# Altium PCB main.PcbDoc
Units mm, origin at the board's own origin, x right, y up, seen from the top; angles counter-clockwise.
Board outline 44.07 x 68.45 mm, 2 copper layers (Top Layer, Bottom Layer), stack 1.271 mm thick; 46 components, 47 nets, 167 pads, 75 vias.
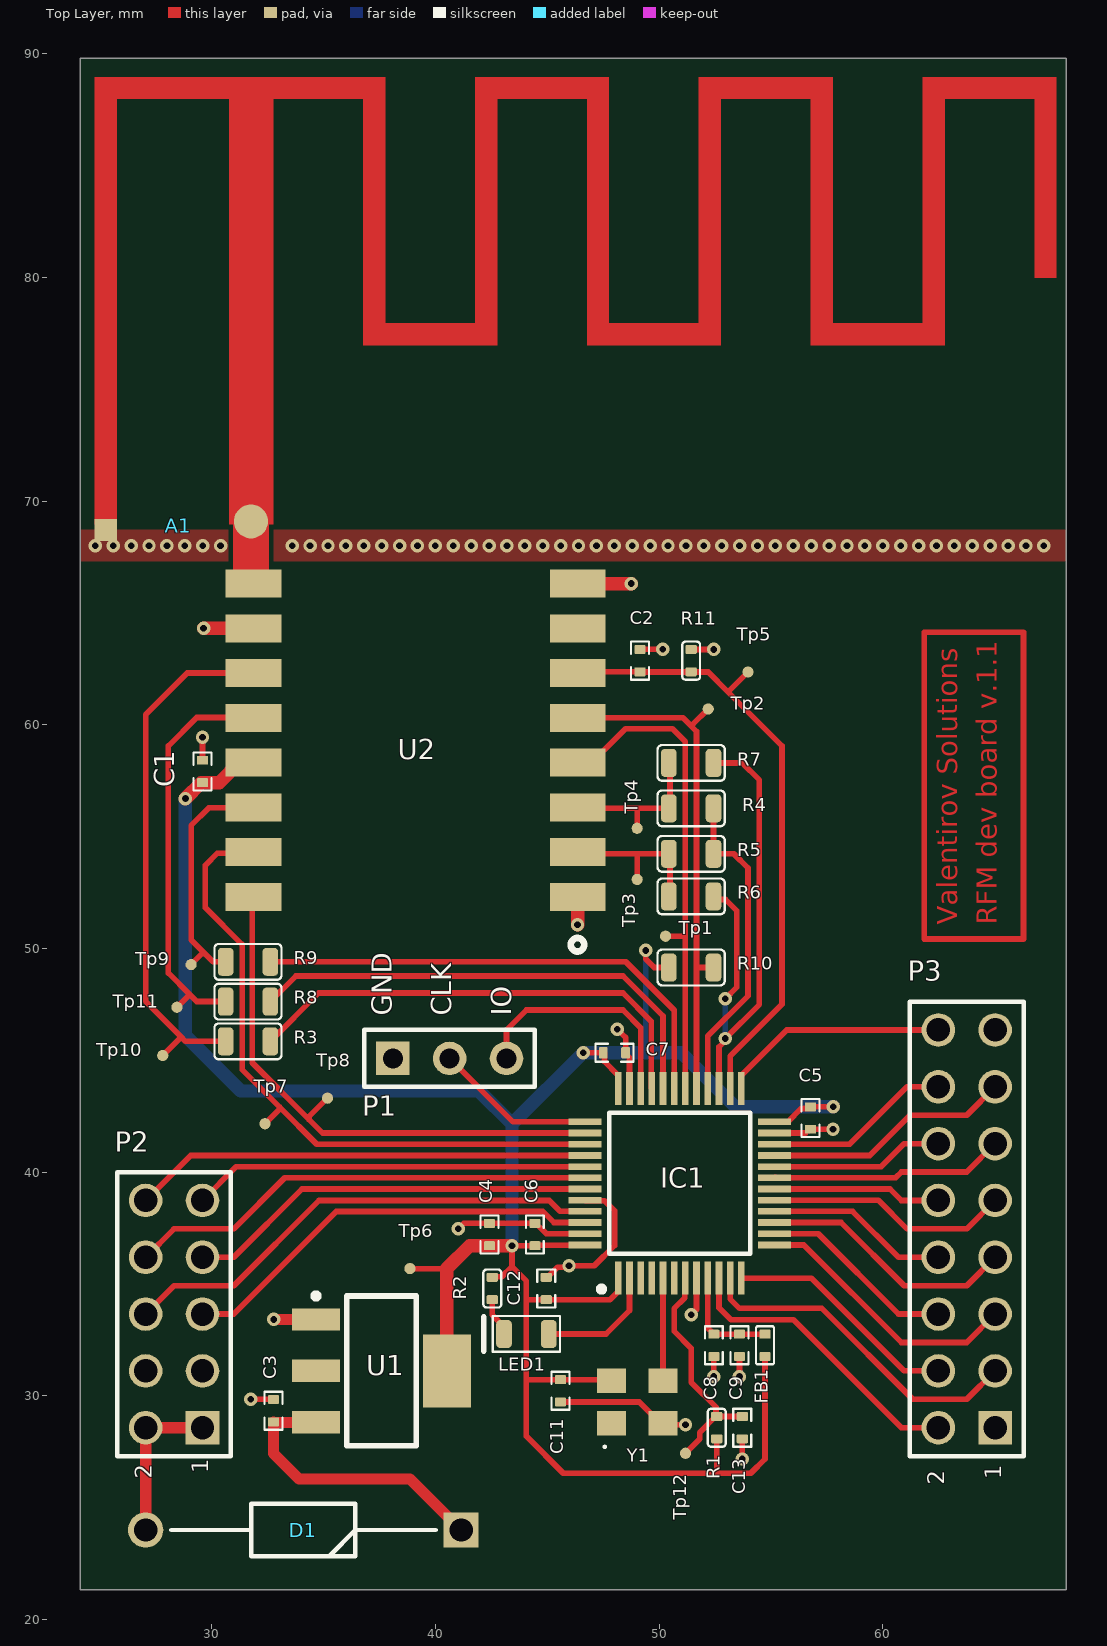
[diagram p0: Top Layer view]
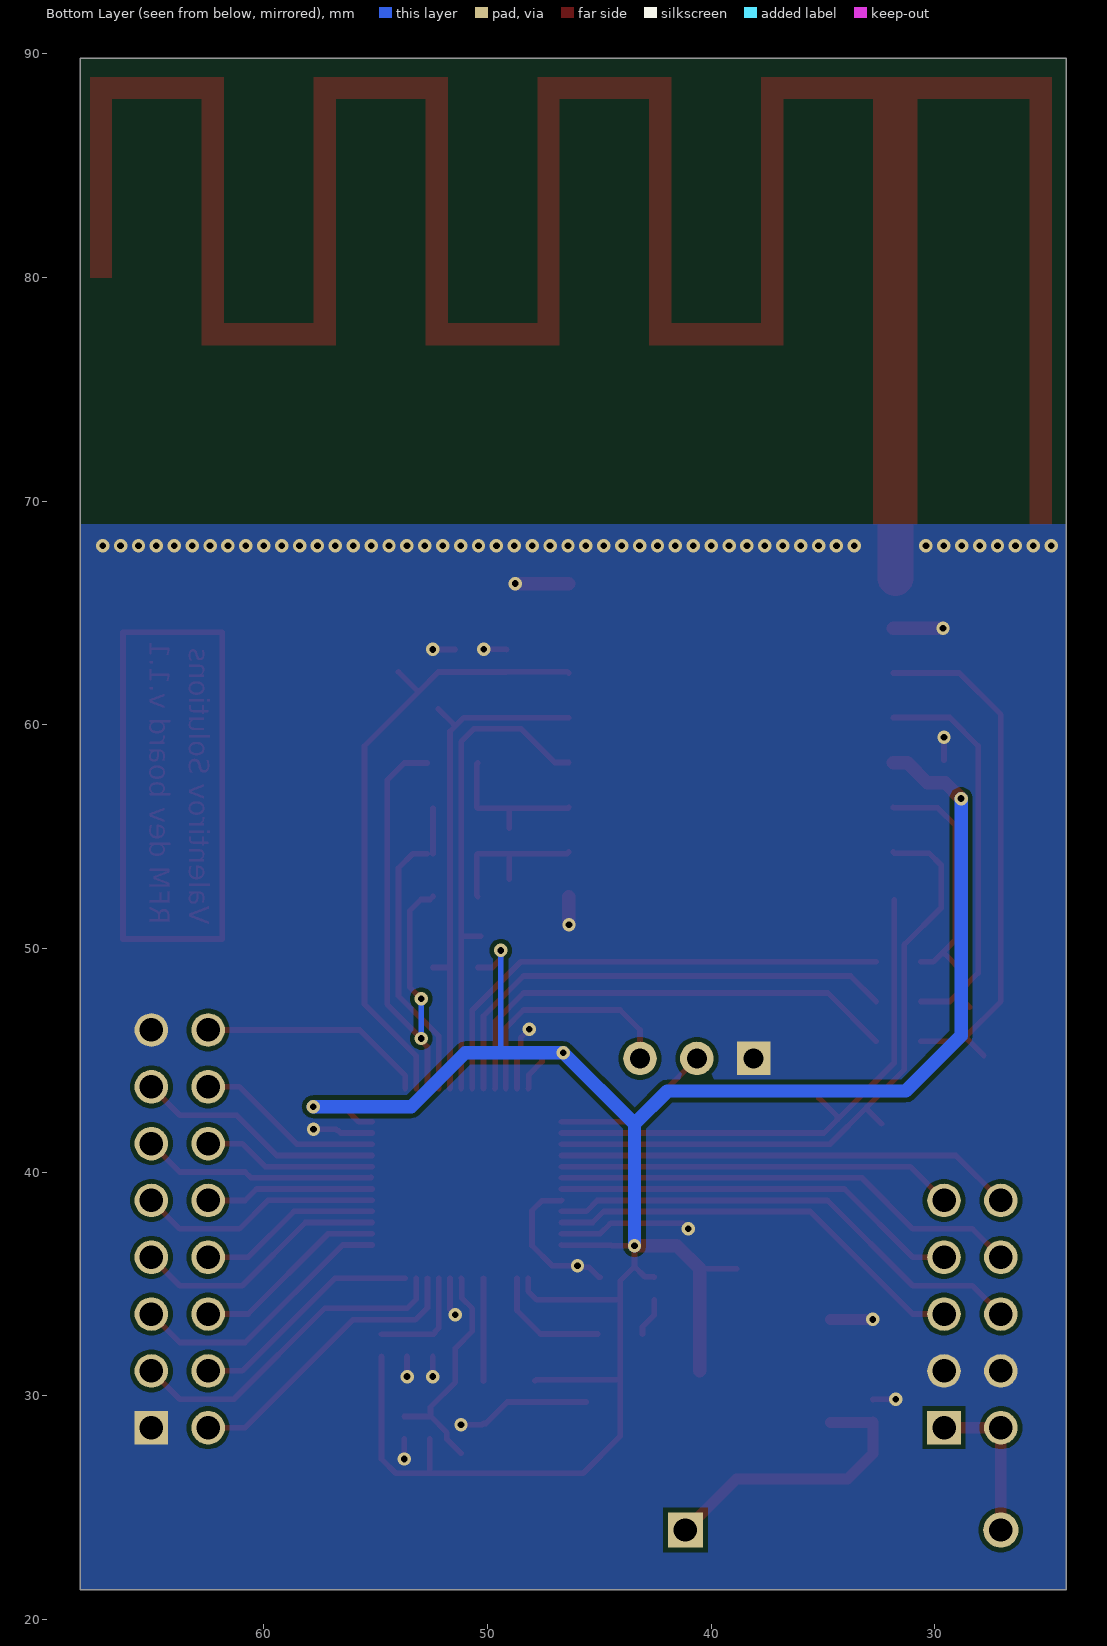
[diagram p1: Bottom Layer view, seen from below]
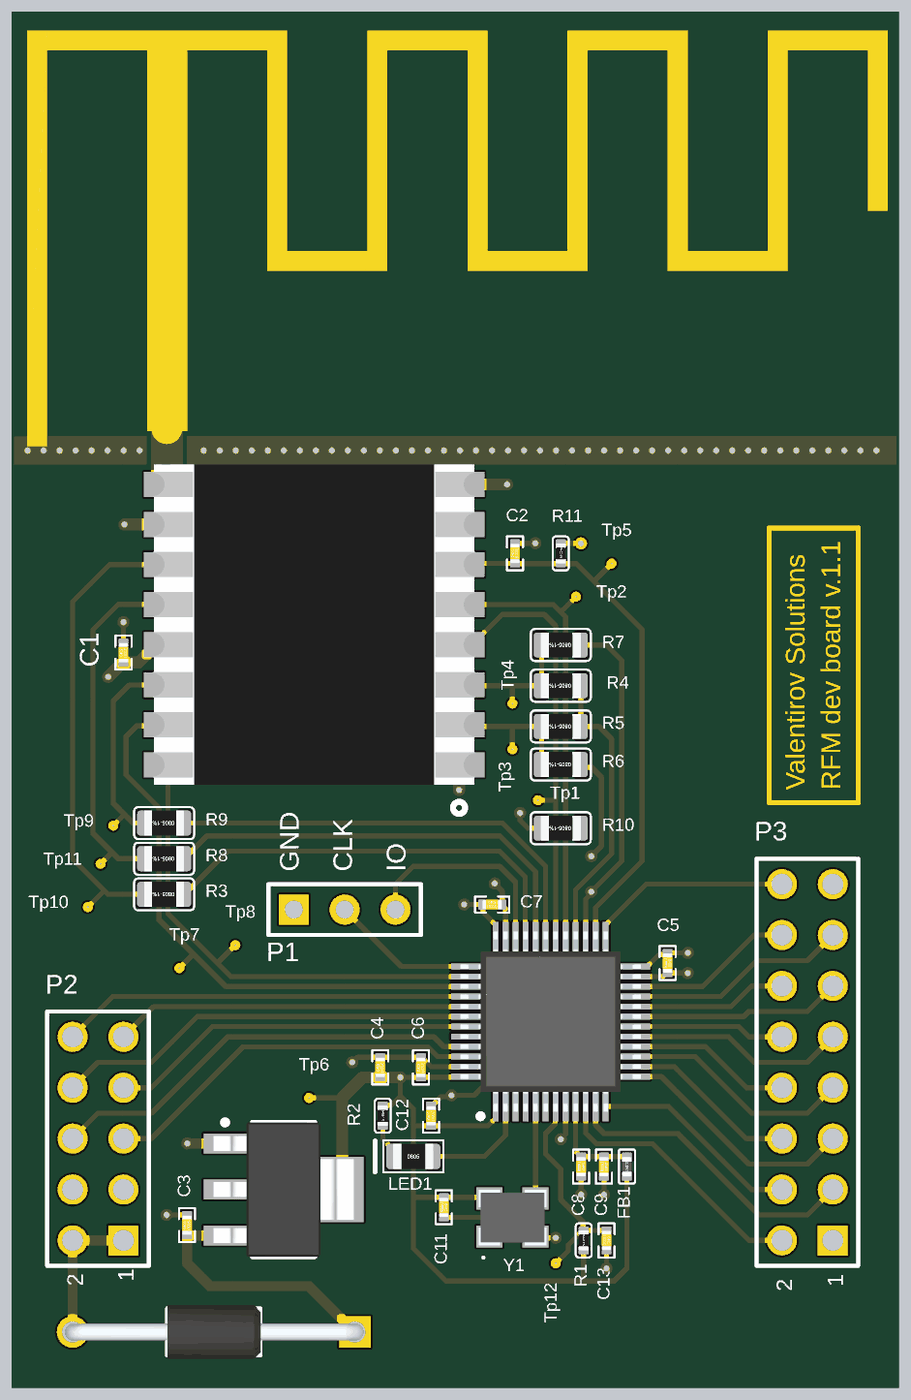
[diagram p2: 3D render of the assembled board from above, using the file's embedded part models]

## Layer stack, top to bottom
Top Solder: solder mask 0.0102, Solder Resist, Dk 3.5
Top Layer: signal copper 0.0356
Dielectric 1: dielectric 1.2, FR-4, Dk 4.6
Bottom Layer: signal copper 0.0356
Bottom Solder: solder mask 0.0102, Solder Resist, Dk 3.5

## Board outline
68.199,21.336 24.13,21.336 24.13,89.789 68.199,89.789

## Design rules (kind name [scope] priority, off if disabled: settings)
Clearance [All] p1: gap=0.2 ignorepadtopadclearanceinfootprint=FALSE
PlaneConnect PlaneConnect_1 [InNet('GND')] p1: planeconnectstyle=Direct reliefexpansion=0.508 reliefentries=4 reliefconductorwidth=0.254 reliefairgap=0.254
PlaneConnect [All] p2: planeconnectstyle=Relief reliefexpansion=0.508 reliefentries=4 reliefconductorwidth=0.254 reliefairgap=0.254
PolygonConnect PolygonConnect_1 [InNet('GND') vs InNet('GND')] p1: connectstyle=Direct reliefconductorwidth=0.254 reliefentries=4 polygonreliefangle="90 Angle" airgapwidth=0.254
PolygonConnect [All] p2: connectstyle=Relief reliefconductorwidth=0.254 reliefentries=4 polygonreliefangle="90 Angle" airgapwidth=0.254
RoutingVias [All] p1: holewidth=0.3 width=0.6 viastyle="Through Hole" minholewidth=0.3 minwidth=0.6 maxholewidth=0.7 maxwidth=1.27
SolderMaskExpansion [All] p1: expansion=0.102 istentingtop=FALSE
Width Width_power [InNet('+3.3V')] p1: maxlimit=1 minlimit=0.254 preferedwidth=0.5 minimp=50.000000 maximp=50.000000 favimp=50.000000
Width [All] p2: maxlimit=1.6 minlimit=0.254 preferedwidth=0.254 bottomlayer_maxwidth=0.254 minimp=50.000000 maximp=50.000000 favimp=50.000000
29 further rules are at their usual default settings.

## Classes and differential pairs
component class rfm: A1 C1 C2 R10 R11 Tp3 Tp4 Tp7 Tp8 Tp9 Tp10 Tp11 U2
component class headers: P1 P2 P3
component class main: C3 C4 C5 C6 C7 C8 C9 C11 C12 C13 D1 FB1 IC1 LED1 R1 R2 R3 R4 R5 R6 R7 R8 R9 Tp1 Tp2 Tp5 Tp6 Tp12 U1 Y1

## Components (designator, comment, footprint, x,y, rotation, side; value= is the part's Value field where it differs from the comment)
A1 "Inverted F antenna" Invertef_F-footprint 24.773,68.961 r0 top net-tie
C1 "100n" "C 0402(1005)x0.5" 29.591,57.912 r90 top
C2 "680p" "C 0402(1005)x0.5" 49.149,62.865 r90 top
C3 "100n" "C 0402(1005)x0.5" 32.766,29.337 r90 top
C4 "10u" "C 0402(1005)x0.5" 42.418,37.211 r90 top
C5 "100n" "C 0402(1005)x0.5" 56.769,42.418 r270 top
C6 "100n" "C 0402(1005)x0.5" 44.45,37.211 r90 top
C7 "100n" "C 0402(1005)x0.5" 48.006,45.339 r0 top
C8 "100n" "C 0402(1005)x0.5" 52.451,32.258 r270 top
C9 "1u" "C 0402(1005)x0.5" 53.594,32.258 r270 top
C11 "0.1u" "C 0402(1005)x0.5" 45.593,30.226 r270 top
C12 "100n" "C 0402(1005)x0.5" 44.958,34.798 r90 top
C13 "100n" "C 0402(1005)x0.5" 53.721,28.575 r270 top
D1 "1N4007-E3_73" DIOAD1405W86L465D235 41.151,24.003 r180 top
FB1 "0.525u" "FB 0402(1005)x0.5" 54.737,32.258 r90 top
IC1 "STM32L4Q5CGT6" QFP50P900X900X160-48N 50.927,39.497 r90 top
LED1 "Blue LED" "R 0805(2012)" 44.069,32.766 r0 top
P1 "Header 3" HDR1X3 38.1,45.085 r0 top locked
P2 "Header 5X2" HDR2X5 29.591,28.575 r90 top locked
P3 "Header 8X2" HDR2X8 65.024,28.575 r90 top locked
R1 "10k" "R 0402(1005)-1%" 52.578,28.575 r270 top
R2 "1k" "R 0402(1005)-1%" 42.545,34.798 r270 top
R3 "0" "R 0805(2012)-1%" 31.623,45.847 r180 top
R4 "0" "R 0805(2012)-1%" 51.435,56.261 r180 top
R5 "0" "R 0805(2012)-1%" 51.435,54.229 r180 top
R6 "0" "R 0805(2012)-1%" 51.435,52.324 r180 top
R7 "0" "R 0805(2012)-1%" 51.435,58.293 r180 top
R8 "0" "R 0805(2012)-1%" 31.623,47.625 r180 top
R9 "0" "R 0805(2012)-1%" 31.623,49.403 r180 top
R10 "0" "R 0805(2012)-1%" 51.435,49.149 r180 top
R11 "100k" "R 0402(1005)-1%" 51.435,62.865 r270 top
Tp1 "Tp" Tp-0.5 50.292,50.546 r90 top
Tp2 "Tp" Tp-0.5 52.197,60.706 r90 top
Tp3 "Tp" Tp-0.5 49.022,53.086 r0 top
Tp4 "Tp" Tp-0.5 49.022,55.372 r0 top
Tp5 "Tp" Tp-0.5 53.975,62.357 r90 top
Tp6 "Tp" Tp-0.5 38.862,35.687 r90 top
Tp7 "Tp" Tp-0.5 32.385,42.164 r90 top
Tp8 "Tp" Tp-0.5 35.179,43.307 r90 top
Tp9 "Tp" Tp-0.5 29.083,49.276 r90 top
Tp10 "Tp" Tp-0.5 27.813,45.212 r90 top
Tp11 "Tp" Tp-0.5 28.448,47.371 r90 top
Tp12 "Tp" Tp-0.5 51.181,27.432 r90 top
U1 "LD1117S33" SOT230P700X180-4N 37.592,31.115 r0 top
U2 "HopeRF Electronics RFM69" CAC-200P1600X1600-16N 39.116,59.309 r180 top locked
Y1 "ECS-TXO-3225MV-240-TR" ECSTXO3225MV240TR 49.022,29.718 r0 top

## Footprints (in the part's own frame and the unit in brackets; to place one, negate y for a bottom-side part, rotate by r counter-clockwise, add the part's x,y. Pads: shape width x height; smd on the part's side, far side on the other; paste and mask are expansions set on the pad)
"C 0402(1005)x0.5" [mm]
  rrect25% 0.4x0.5 smd mask+0.102: 1(-0.5,0) 2(0.5,0)
  silkscreen extent -0.85,-0.4 0.85,0.4, body extent -0.5,-0.25 0.5,0.25, height 0.51
CAC-200P1600X1600-16N [mm] "Chip Array, Concave, 16-Leads, Pitch 2.00mm,  Body 16.00x16.00mm,  IPC Medium Density"
  rect 2.5x1.25 smd: 1(-7.25,7) 2(-7.25,5) 3(-7.25,3) 4(-7.25,1) 5(-7.25,-1) 6(-7.25,-3) 7(-7.25,-5) 8(-7.25,-7) 9(7.25,-7) 10(7.25,-5) 11(7.25,-3) 12(7.25,-1) 13(7.25,1) 14(7.25,3) 15(7.25,5) 16(7.25,7)
  silkscreen extent -7.54,8.84 -6.94,9.44, body extent -8.05,-8 8.05,8, height 1.8
DIOAD1405W86L465D235 [mm]
  rect 1.575x1.575 hole 1.05: 1(0,0)
  round 1.575 hole 1.05: 2(14.1,0)
  silkscreen extent 1.14,-1.17 12.96,1.17, body extent -0.43,-1.34 14.48,1.34, height 2.7
ECSTXO3225MV240TR [mm]
  rect 1.3x1.1 smd: 1(-1.15,-0.95) 2(1.15,-0.95) 3(1.15,0.95) 4(-1.15,0.95)
  silkscreen extent -1.5,-2.05 -1.4,-1.95, body extent -1.69,-1.39 1.69,1.39, height 1.3
"FB 0402(1005)x0.5" [mm]
  rrect25% 0.4x0.5 smd mask+0.102: 1(-0.5,0) 2(0.5,0)
  silkscreen extent -0.85,-0.4 0.85,0.4, body extent -0.5,-0.25 0.5,0.25, height 0.5
HDR1X3 [mm] "Connector; Header; 3 Position"
  rect 1.5x1.5 hole 0.9: 1(0,0)
  round 1.5 hole 0.9: 2(2.54,0) 3(5.08,0)
  silkscreen extent -1.27,-1.27 6.35,1.27
HDR2X5 [mm] "Connector; Header; 5x2 Position"
  rect 1.5x1.5 hole 1.05: 1(0,0)
  round 1.5 hole 1.05: 2(0,2.54) 3(2.54,0) 4(2.54,2.54) 5(5.08,0) 6(5.08,2.54) 7(7.62,0) 8(7.62,2.54) 9(10.16,0) 10(10.16,2.54)
  silkscreen extent -1.27,-1.27 11.43,3.81
HDR2X8 [mm] "Connector; Header; 8x2 Position"
  rect 1.5x1.5 hole 1.05: 1(0,0)
  round 1.5 hole 1.05: 2(0,2.54) 3(2.54,0) 4(2.54,2.54) 5(5.08,0) 6(5.08,2.54) 7(7.62,0) 8(7.62,2.54) 9(10.16,0) 10(10.16,2.54) 11(12.7,0) 12(12.7,2.54) 13(15.24,0) 14(15.24,2.54) 15(17.78,0) 16(17.78,2.54)
  silkscreen extent -1.27,-1.27 19.05,3.81
Invertef_F-footprint [mil]
  round 60 smd paste-99999 mask+0: 1(275,5)
  rect 39.37x39.37 smd paste-99999 mask+0: 2(19.68,-10)
  Top Layer region: 0,0 39.37,0 39.37,787.4 0,787.4
  Top Layer region: 472.44,314.96 708.66,314.96 708.66,354.33 472.44,354.33
  Top Layer region: 1062.99,748.03 1299.21,748.03 1299.21,787.4 1062.99,787.4
  Top Layer region: 1456.69,314.96 1496.06,314.96 1496.06,787.4 1456.69,787.4
  Top Layer region: 866.14,314.96 905.51,314.96 905.51,787.4 866.14,787.4
  Top Layer region: 1259.84,314.96 1496.06,314.96 1496.06,354.33 1259.84,354.33
  Top Layer region: 1653.54,433.07 1692.91,433.07 1692.91,787.4 1653.54,787.4
  Top Layer region: 472.44,314.96 511.81,314.96 511.81,787.4 472.44,787.4
  Top Layer region: 866.14,314.96 1102.36,314.96 1102.36,354.33 866.14,354.33
  Top Layer region: 1062.99,314.96 1102.36,314.96 1102.36,787.4 1062.99,787.4
  Top Layer region: 19.72,748.01 492.16,748.01 492.16,787.38 19.72,787.38
  Top Layer region: 669.29,748.03 905.51,748.03 905.51,787.4 669.29,787.4
  Top Layer region: 236.19,0.02 314.93,0.02 314.93,787.42 236.19,787.42
  Top Layer region: 669.29,314.96 708.66,314.96 708.66,787.4 669.29,787.4
  Top Layer region: 1259.84,314.96 1299.21,314.96 1299.21,787.4 1259.84,787.4
  Top Layer region: 1456.69,748.03 1692.91,748.03 1692.91,787.4 1456.69,787.4
QFP50P900X900X160-48N [mm]
  rect 1.475x0.3 smd: 1(-4.238,2.75) 2(-4.238,2.25) 3(-4.238,1.75) 4(-4.238,1.25) 5(-4.238,0.75) 6(-4.238,0.25) 7(-4.238,-0.25) 8(-4.238,-0.75) 9(-4.238,-1.25) 10(-4.238,-1.75) 11(-4.238,-2.25) 12(-4.238,-2.75) 25(4.238,-2.75) 26(4.238,-2.25) 27(4.238,-1.75) 28(4.238,-1.25) 29(4.238,-0.75) 30(4.238,-0.25) 31(4.238,0.25) 32(4.238,0.75) 33(4.238,1.25) 34(4.238,1.75) 35(4.238,2.25) 36(4.238,2.75)
  rect 0.3x1.475 smd: 13(-2.75,-4.238) 14(-2.25,-4.238) 15(-1.75,-4.238) 16(-1.25,-4.238) 17(-0.75,-4.238) 18(-0.25,-4.238) 19(0.25,-4.238) 20(0.75,-4.238) 21(1.25,-4.238) 22(1.75,-4.238) 23(2.25,-4.238) 24(2.75,-4.238) 37(2.75,4.238) 38(2.25,4.238) 39(1.75,4.238) 40(1.25,4.238) 41(0.75,4.238) 42(0.25,4.238) 43(-0.25,4.238) 44(-0.75,4.238) 45(-1.25,4.238) 46(-1.75,4.238) 47(-2.25,4.238) 48(-2.75,4.238)
  silkscreen extent -4.85,-3.15 3.15,3.62, body extent -4.5,-4.5 4.5,4.5, height 1.6
"R 0402(1005)-1%" [mm]
  rrect25% 0.4x0.5 smd mask+0.102: 1(-0.5,0) 2(0.5,0)
  silkscreen extent -0.85,-0.4 0.85,0.4, body extent -0.5,-0.25 0.5,0.25, height 0.19
"R 0805(2012)" [mm]
  rrect50% 0.7x1.25 smd: 1(-1,0) 2(1,0)
  silkscreen extent -1.5,-0.8 1.5,0.8, body extent -1,-0.62 1,0.63, height 0.6
"R 0805(2012)-1%" [mm]
  rrect50% 0.7x1.25 smd: 1(-1,0) 2(1,0)
  silkscreen extent -1.5,-0.8 1.5,0.8, body extent -1,-0.62 1,0.63, height 0.6
SOT230P700X180-4N [mm] "SOT223, 4-Leads, Body 6.50x7.00mm (avg), Pitch 2.30mm, IPC Medium Density"
  rect 2.15x1 smd: 1(-2.925,2.3) 2(-2.925,0) 3(-2.925,-2.3)
  rect 2.15x3.25 smd: 4(2.925,0)
  silkscreen extent -3.05,-3.35 1.55,3.47, body extent -3.5,-3.35 3.5,3.35, height 1.8
Tp-0.5 [mm]
  round 0.5 smd paste-0.2: 1(0,0)

## Part data
A1: library part inverted_F
C1 C2 C3 C4 C5 C6 C7 C8 C9 C11 C12 C13: library part "C 0402    16V X5R - 0*", "SMD 0402     16V X5R 10%", Manufacturer=Samsung, Package=0402, Package-mm=1005, TempCo=X5R, Temperature Range="-55°C ~ +85°C", Tolerance %=±20%, ComponentLink1Description="Datasheet Link", ComponentLink1URL=https://store.comet.bg/download-file.php?id=11, Mount Type=SMT, Published=07.04.2019, Publisher=Hefest, RoHS=Y, Supplier 1=Comet, Technology="Ceramic  MLCC", TYPE=Capacitors, VDC=16V
D1: "Diode", Arrow Part Number=1N4007-E3/73, Manufacturer_Name=Vishay, Mouser Part Number=625-1N4007-E3/73, Arrow Price/Stock=https://www.arrow.com/en/products/1n4007-e373/vishay?region=europe, Datasheet Link=https://mouser.componentsearchengine.com/Datasheets/2/1N4007-E3_73.pdf, Manufacturer_Part_Number=1N4007-E3/73, Mouser Price/Stock=https://www.mouser.co.uk/ProductDetail/Vishay-General-Semiconductor/1N4007-E3-73?qs=N4vtoAxH%2FSqT3Ng3e4K0Gw%3D%3D
FB1: library part "FB BKH1005LM182-T", "SMD 0402    0.2A 1.8kΩ/2Ω", DC Resistance=2Ω, Manufacturer=Murata, Package=0402, Package-mm=1005, Part Number=BKH1005LM182-T, Supplier Part Number 1=963-BKH1005LM182-T, Temperature Range="-55°C ~ +125°C", Tolerance %=±25%, ComponentLink1Description="Datasheet Link", ComponentLink1URL=https://www.mouser.bg/datasheet/2/396/mlci12_e-1516614.pdf, Imax=0.2A, Ind=0.52uH, Material=Ferrite, Mount Type=SMT, Price=0.2, Published=07.04.2019, Publisher=Hefest, RoHS=Y, Supplier 1=Mouser, Technology=Chip, TYPE="Ferrite Bead", Ztyp@1GHz=2.7k, ZTyp@100MHz=1.8k
IC1: "Integrated Circuit", Manufacturer_Name=STMicroelectronics, Mouser Part Number=511-STM32L4Q5CGT6, Datasheet Link=https://www.st.com/resource/en/datasheet/stm32l4q5ag.pdf, Height=1.6mm, Manufacturer_Part_Number=STM32L4Q5CGT6, Mouser Price/Stock=https://www.mouser.co.uk/ProductDetail/STMicroelectronics/STM32L4Q5CGT6?qs=xZ%2FP%252Ba9zWqa0QI8asRSMRw%3D%3D
LED1: library part "R 0805-5%", "https://www.rcscomponents.kiev.ua/product/svitlodiod-0805-synii-kt-smd0805-b-kento_86409.html", Manufacturer=YAGEO, Package=0805, Package-mm=2012, Power=0.125W, Supplier Part Number 1="R0805 1.0K 5% YAG", TempCo=±100ppm/°C, Temperature Range="-55°C ~ +155°C", Tolerance %=±5%, Value Code=102, ComponentLink1Description="Datasheet Link", ComponentLink1URL=https://store.comet.bg/download-file.php?id=140, Mount Type=SMT, Price=0.029, Published=07.04.2019, Publisher=Hefest, RoHS=Y, Supplier 1=Comet, Technology="Thick film", TYPE=Resistor, VDC=150V
P1: "Header, 3-Pin", LatestRevisionDate=17-Jul-2002, LatestRevisionNote="Re-released for DXP Platform.", Publisher="Altium Limited"
P2: "Header, 5-Pin, Dual row", LatestRevisionDate=17-Jul-2002, LatestRevisionNote="Re-released for DXP Platform.", Publisher="Altium Limited"
P3: "Header, 8-Pin, Dual row", LatestRevisionDate=17-Jul-2002, LatestRevisionNote="Re-released for DXP Platform.", Publisher="Altium Limited"
R1 R2 R11: library part "R 0402-1%", "SMD 0402 0.063W 1%   50V", Manufacturer=YAGEO, Package=0402, Package-mm=1005, Power=0.0625W, Supplier Part Number 1="R0402 1.0K 1% YAG/ASJ", TempCo=±100ppm/°C, Temperature Range="-55°C ~ +155°C", Tolerance %=±1%, Value Code=1001, ComponentLink1Description="Datasheet Link", ComponentLink1URL=https://store.comet.bg/download-file.php?id=1224, Mount Type=SMT, Price=0.015, Published=07.04.2019, Publisher=Hefest, RoHS=Y, Supplier 1=Comet, Technology="Thick film", TYPE=Resistor, VDC=50V
R3 R4 R5 R6 R7 R8 R9 R10: library part "R 0805-1%", "SMD 0805 0.125W 1% 150V", Manufacturer=YAGEO, Package=0805, Package-mm=2012, Power=0.125W, Supplier Part Number 1="R0805 1.0K 1% YAG/ASJ", TempCo=±100ppm/°C, Temperature Range="-55°C ~ +155°C", Tolerance %=±1%, Value Code=1001, ComponentLink1Description="Datasheet Link", ComponentLink1URL=https://store.comet.bg/download-file.php?id=1224, Mount Type=SMT, Price=0.031, Published=07.04.2019, Publisher=Hefest, RoHS=Y, Supplier 1=Comet, Technology="Thick film", TYPE=Resistor, VDC=150V
Tp1 Tp2 Tp3 Tp4 Tp5 Tp6 Tp7 Tp8 Tp9 Tp10 Tp11 Tp12: "TestPoint", Mount Type=SMT, Package=TestPoint, Published=07.04.2019, Publisher=Hefest, Technology=PCB, TYPE=TestPoint
U1: "Linear voltage regulator. / Uin, V: 15 V / Uout,V: 3,3 V / Iout,A: 0,8 A / Udrop, V: 1,1 V"
U2: library part RFM69
Y1: "Crystal or Oscillator", Manufacturer_Name=ECS, Mouser Part Number=520-TXO-3225MV-240-T, Arrow Part Number=ECS-TXO-3225MV-240-TR, Arrow Price/Stock=https://www.arrow.com/en/products/ecs-txo-3225mv-240-tr/ecs-international?region=nac, Datasheet Link=https://eu.mouser.com/datasheet/2/122/ECS-TXO-3225MV-1634330.pdf, Height=1.2mm, Manufacturer_Part_Number=ECS-TXO-3225MV-240-TR, Mouser Price/Stock=https://www.mouser.co.uk/ProductDetail/ECS/ECS-TXO-3225MV-240-TR?qs=d0WKAl%252BL4KYXn7UuwSFJGQ%3D%3D

## Via types
v1: diameter 0.6, hole 0.3, Top Layer to Bottom Layer, tented both sides, 74 vias
v2: diameter 0.6, hole 0.3, Top Layer to Bottom Layer, 1 vias

## Nets (pads, with @x,y where several pads share a name; then routed paths per layer and width w, separated by ;. In a path a pad name is that pad's centre, name@x,y a point inside that pad or via, vN(x,y) a via of type N, cw(c..) or ccw(c..) an arc to the next point about the centre after c; other vN are vias at no path point)
+3.3V: C1.1 C4.1 C5.1 C6.1 C7.1 C11.1 C12.1 FB1.1 IC1.1 IC1.24 IC1.36 IC1.48 R1.2 R2.1 R10.2 Tp6.1 U1.4 U2.13 Y1.4 | length 113.6
  Top Layer w0.254: Tp6.1 40.513,35.687 40.517,35.691 ; R2.1 42.571,35.324 42.97,35.324 43.426,35.78 ; v1(43.426,36.711) 43.426,35.78 ; v1@43.434,36.703 43.442,36.711 C6.1 44.468,36.729 46.671,36.729 IC1.48 ; v1(46.609,45.339) C7.1 47.559,45.286 47.559,44.94 48.154,44.346 48.154,43.758 IC1.36 ; Y1.4 47.814,30.726 C11.1 44.077,30.726 44.069,30.734 ; IC1.1 48.177,34.671 47.804,34.298 C12.1 44.077,34.298 44.069,34.29 ; v1(49.403,49.911) 49.403,49.53 49.784,49.149 R10.2 ; R1.2 52.578,26.543 ; FB1.1 54.737,27.178 54.102,26.543 52.578,26.543 ; IC1.24 55.753,42.247 56.351,42.845 56.696,42.845 C5.1 56.773,42.922 57.781,42.922 v1(57.785,42.926) ; 43.426,35.78 44.069,35.137 44.069,34.29 ; 44.069,30.734 44.069,34.29 ; 44.069,30.734 44.069,28.194 45.72,26.543 52.578,26.543
  Top Layer w0.5: v1(43.426,36.711) v1@43.434,36.703
  Top Layer w0.6: v1(28.829,56.7) 29.541,57.412 C1.1 30.344,57.412 31.241,58.309 U2.13 ; U1.4 40.517,35.691 41.537,36.711 C4.1 v1(43.426,36.711)
  Bottom Layer w0.254: 49.403,45.339 v1(49.403,49.911)
  Bottom Layer w0.6: v1(28.829,56.7) 28.829,46.101 31.301,43.629 41.953,43.629 43.426,42.156 ; v1(43.426,36.711) 43.426,42.156 ; v1(57.785,42.926) 53.404,42.926 50.991,45.339 49.403,45.339 v1(46.609,45.339) 43.426,42.156
DIO0: R9.2 Tp9.1 U2.14 | length 11
  Top Layer w0.254: Tp9.1 29.575,49.768 29.575,49.895 ; R9.2 30.067,49.403 29.575,49.895 ; U2.14 31.849,56.292 29.876,56.292 29.083,55.499 29.083,50.387 29.575,49.895
DIO1: IC1.39 Tp7.1 U2.15 | length 29.9
  Top Layer w0.254: U2.15 31.817,54.26 30.257,54.26 29.718,53.721 29.718,51.816 31.362,50.172 31.362,44.584 33.03,42.916 ; Tp7.1 33.03,42.809 33.03,42.916 ; IC1.39 34.699,41.247 33.03,42.916
DIO2: IC1.38 Tp8.1 U2.16 | length 24.8
  Top Layer w0.254: U2.16@31.816,52.182 31.816,44.892 34.354,42.355 ; Tp8.1 34.354,42.482 34.354,42.355 ; IC1.38 34.961,41.747 34.354,42.355
DIO3: R3.2 Tp10.1 U2.11 | length 23.9
  Top Layer w0.254: Tp10.1 28.575,45.974 28.702,45.974 ; R3.2 28.829,45.847 28.702,45.974 ; U2.11 28.908,62.309 27.051,60.452 27.051,47.625 28.639,46.038 28.702,45.974
DIO4: R8.2 Tp11.1 U2.12 | length 18.4
  Top Layer w0.254: Tp11.1 29.02,47.942 ; R8.2 29.337,47.625 29.02,47.942 ; U2.12 31.85,60.325 29.337,60.325 28.067,59.055 28.067,48.895 29.02,47.942
GND: A1.2 C1.2 C2.2 C3.2 C4.2 C5.2 C6.2 C7.2 C8.2 C9.2 C11.2 C12.2 C13.2 IC1.8 IC1.23 IC1.35 IC1.44 IC1.47 P1.1 P2.3 P2.4 P3.1 P3.15 R11.1 U1.1 U2.1 U2.8 U2.10 Y1.2 | length 40.5
  Top Layer w0.254: C1.2 v1(29.591,59.436) ; v1(31.75,29.845) 31.754,29.841 32.762,29.841 C3.2 ; v1(41.021,37.465) 41.267,37.711 C4.2 C6.2 44.5,37.711 44.964,37.247 IC1.47 ; C12.2 45.008,35.298 45.458,35.748 45.908,35.748 v1(45.974,35.814) 47.106,35.814 48.006,36.714 48.006,38.28 47.562,38.724 46.712,38.724 IC1.44 ; v1(48.133,46.388) 48.506,46.015 C7.2 48.579,45.266 48.579,45.216 48.677,45.118 IC1.35 ; C2.2 49.157,63.373 49.161,63.369 50.161,63.369 v1(50.165,63.373) ; R11.1 v2(52.443,63.365) ; v1(52.451,30.861) C8.2 ; v1(53.594,30.861) C9.2 ; v1(53.721,27.178) C13.2 ; IC1.23 56.548,41.747 56.646,41.845 56.696,41.845 C5.2 v1(57.777,41.918)
  Top Layer w0.256: C11.2 49.114,29.726 50.072,28.768 Y1.2 50.238,28.702 v1(51.181,28.702) ; v1(51.435,33.621) 51.677,33.863 IC1.8
  Top Layer w0.5: v1(32.78,33.415) U1.1
  Top Layer w0.6: v1(29.638,64.309) U2.10 ; v1(46.355,51.054) 46.366,51.065 U2.1 ; U2.8 v1(48.753,66.309)
  other v1: 24.8,68 25.6,68 26.4,68 27.2,68 28,68 28.8,68 29.6,68 30.4,68 33.6,68 34.4,68 35.2,68 36,68 36.8,68 37.6,68 38.4,68 39.2,68 40,68 40.8,68 41.6,68 42.4,68 43.2,68 44,68 44.8,68 45.6,68 46.4,68 47.2,68 48,68 48.8,68 49.6,68 50.4,68 51.2,68 52,68 52.8,68 53.6,68 54.4,68 55.2,68 56,68 56.8,68 57.6,68 58.4,68 59.2,68 60,68 60.8,68 61.6,68 62.4,68 63.2,68 64,68 64.8,68 65.6,68 66.4,68 67.2,68
NetA1_1: A1.1 U2.9 | length 2.5
  Top Layer w1.6: U2.9@31.758,66.548 A1.1
NetC3_1: C3.1 D1.1 U1.3 | length 13.1
  Top Layer w0.5: U1.3 32.788,28.815 C3.1 32.766,27.432 33.909,26.289 38.865,26.289 D1.1
NetC8_1: C8.1 C9.1 FB1.2 IC1.9 | length 4.9
  Top Layer w0.254: IC1.9 52.177,33.032 52.328,32.881 52.328,32.831 52.401,32.758 C8.1 C9.1 FB1.2
NetIC1_2: IC1.2 LED1.2 | length 5.5
  Top Layer w0.256: LED1.2 47.625,32.766 48.677,33.818 IC1.2
NetIC1_27: IC1.27 R6.1 R7.1 | length 23.9
  Top Layer w0.254: R6.1 52.57,52.189 52.967,52.189 53.467,51.689 53.467,48.26 v1(52.959,47.752) ; IC1.27 52.677,45.598 52.959,45.88 v1(52.959,45.974) 54.483,47.498 54.483,57.531 53.721,58.293 R7.1@52.689,58.293
  Bottom Layer w0.254: v1(52.959,45.974) v1(52.959,47.752)
NetIC1_28: IC1.28 R4.1 R5.1 | length 14.2
  Top Layer w0.254: IC1.28 52.177,46.081 53.975,47.879 53.975,53.594 53.34,54.229 R5.1@52.689,54.229 ; R5.1 R4.1
NetIC1_31: IC1.31 R9.1 | length 22.5
  Top Layer w0.254: R9.1 48.514,49.403 50.677,47.24 IC1.31
NetIC1_32: IC1.32 R8.1 | length 22
  Top Layer w0.254: R8.1 33.766,48.768 48.387,48.768 50.177,46.978 IC1.32
NetIC1_33: IC1.33 R3.1 | length 21.5
  Top Layer w0.254: R3.1 34.782,48.006 48.387,48.006 49.654,46.739 49.654,43.758 IC1.33
NetLED1_1: LED1.1 R2.2 | length 1.7
  Top Layer w0.254: R2.2 42.545,33.615 43.069,33.091 LED1.1
NRST: C13.1 IC1.7 R1.1 Tp12.1 | length 10.6
  Top Layer w0.254: IC1.7 51.154,35.236 51.154,34.386 50.673,33.905 50.673,32.893 51.435,32.131 51.435,30.607 52.547,29.495 52.547,29.106 R1.1 C13.1 ; Tp12.1 51.816,28.067 51.816,28.363 R1.1@52.547,29.094
OSC_IN: IC1.5 Y1.3 | length 4.6
  Top Layer w0.256: Y1.3 50.177,30.673 IC1.5
PA0: IC1.10 P3.2 | length 13.4
  Top Layer w0.254: IC1.10 52.677,33.937 53.213,33.401 56.007,33.401 60.833,28.575 P3.2
PA1: IC1.11 P3.3 | length 15.2
  Top Layer w0.254: IC1.11 53.177,34.326 53.594,33.909 57.277,33.909 61.341,29.845 63.754,29.845 P3.3
PA2: IC1.12 P3.4 | length 10.5
  Top Layer w0.254: IC1.12 56.816,35.259 60.96,31.115 P3.4
PA3: IC1.13 P3.5 | length 12.2
  Top Layer w0.254: IC1.13 56.471,36.747 60.833,32.385 63.754,32.385 P3.5
PA4: IC1.14 P3.6 | length 8.8
  Top Layer w0.254: IC1.14 57.114,37.247 60.706,33.655 P3.6
PA5: IC1.15 P3.7 | length 11.6
  Top Layer w0.254: IC1.15 58.138,37.747 60.96,34.925 63.754,34.925 P3.7
PA6: IC1.16 P3.8 | length 8.2
  Top Layer w0.254: IC1.16 58.654,38.247 60.706,36.195 P3.8
PA7: IC1.17 P3.9 | length 10.9
  Top Layer w0.254: IC1.17 59.805,38.747 61.087,37.465 63.754,37.465 P3.9
PB0: IC1.18 P3.10 | length 7.5
  Top Layer w0.254: IC1.18 60.321,39.247 60.833,38.735 P3.10
PB1: IC1.19 P3.11 | length 10.5
  Top Layer w0.254: IC1.19@55.188,39.77 55.211,39.747 60.575,39.747 60.833,40.005 63.754,40.005 P3.11
PB2: IC1.20 P3.12 | length 7.7
  Top Layer w0.254: IC1.20 59.932,40.247 60.96,41.275 P3.12
PB4: IC1.40 P2.10 | length 20.5
  Top Layer w0.254: P2.10 29.063,40.747 IC1.40
PB5: IC1.41 P2.9 | length 17.7
  Top Layer w0.254: P2.9 31.103,40.247 IC1.41
PB8: IC1.45 P2.6 | length 21.9
  Top Layer w0.254: P2.6 28.321,34.925 30.988,34.925 34.798,38.735 45.092,38.735 45.58,38.247 IC1.45
PB9: IC1.46 P2.5 | length 19.2
  Top Layer w0.254: P2.5 30.988,33.655 35.571,38.238 44.806,38.238 45.297,37.747 IC1.46
PB10: IC1.21 P3.13 | length 11.1
  Top Layer w0.254: IC1.21 59.416,40.747 61.214,42.545 63.754,42.545 P3.13
PB11: IC1.22 P3.14 | length 8.4
  Top Layer w0.254: IC1.22 58.519,41.247 61.087,43.815 P3.14
PB12: IC1.25 P3.16 | length 10.2
  Top Layer w0.254: IC1.25 53.677,44.323 55.709,46.355 P3.16
RFM_CS: IC1.29 R10.1 Tp2.1 U2.5 | length 23.4
  Top Layer w0.254: U2.5 51.07,60.309 51.374,60.005 ; IC1.29 51.677,49.149 ; Tp2.1 51.496,60.005 51.374,60.005 ; R10.1 51.677,49.149 ; 51.374,60.005 51.677,59.702 51.677,49.149
RFM_MISO: R5.2 R6.2 Tp3.1 U2.2 | length 7.2
  Top Layer w0.254: U2.2 46.446,54.229 49.022,54.229 ; Tp3.1 49.022,54.229 ; R6.2 50.485,52.374 50.485,54.179 R5.2 49.022,54.229
RFM_MOSI: R4.2 R7.2 Tp4.1 U2.3 | length 7.1
  Top Layer w0.254: U2.3 46.414,56.261 49.022,56.261 ; Tp4.1 49.022,56.261 ; R7.2 50.485,58.243 50.485,56.311 R4.2 49.022,56.261
RFM_RESET: C2.1 IC1.26 R11.2 Tp5.1 U2.6 | length 28.1
  Top Layer w0.254: U2.6 46.422,62.365 C2.1 49.157,62.357 52.197,62.357 53.086,61.468 ; IC1.26 53.177,45.181 55.499,47.503 55.499,59.055 53.086,61.468 ; Tp5.1 53.086,61.468
RFM_SCK: IC1.30 Tp1.1 U2.4 | length 22.1
  Top Layer w0.254: U2.4 46.991,58.309 48.499,59.817 50.603,59.817 51.177,59.243 51.177,50.546 ; Tp1.1@50.305,50.546 51.177,50.546 ; IC1.30 51.177,50.546
SWCLK: IC1.37 P1.2 | length 7.2
  Top Layer w0.254: P1.2 43.478,42.247 IC1.37
SWDIO: IC1.34 P1.3 | length 10.7
  Top Layer w0.254: P1.3 43.18,46.355 44.069,47.244 48.387,47.244 49.177,46.454 IC1.34
UART_RX: IC1.43 P2.7 | length 18.4
  Top Layer w0.254: P2.7 30.988,36.195 34.04,39.247 IC1.43
UART_TX: IC1.42 P2.8 | length 21.1
  Top Layer w0.254: P2.8 28.321,37.465 30.988,37.465 33.27,39.747 IC1.42
VCC: D1.2 P2.1 P2.2 | length 7.1
  Top Layer w0.5: D1.2 P2.2 P2.1
pads on no net: IC1.3 IC1.4 IC1.6 U1.2 U2.7 Y1.1
copper on no net: | length 36.3
  Top Layer w0.254: 61.849,50.419 66.294,50.419 66.294,64.135 61.849,64.135 61.849,50.419

## Polygon pours and split planes (outlines as drawn)
GND on Top Layer "GND_L01_P001" (solid, pour order 1): 24.13,68.707 24.742,68.707 24.75,68.715 68.199,68.715 68.199,67.31 24.13,67.31
GND on Bottom Layer "GND_L02_P000" (solid, pour order 0): 24.13,68.961 68.199,68.961 68.199,21.336 24.13,21.336

## Other copper
Top Layer:
  text "Valentirov Solutions" at 63.611,51.055 h1.52 r90
  text "RFM dev board v.1.1" at 65.389,51.054 h1.52 r90

## Silkscreen, mask and mechanical layers (free items; w line width, h text height)
Top Overlay:
  lines w0.254: 42.164,32.004 42.164,33.528
  text "GND" at 38.338,46.99 h1.52 r90
  text "CLK" at 41.005,46.99 h1.52 r90
  text "IO" at 43.672,46.99 h1.52 r90
Top Solder:
  lines w0.254: 61.849,50.419 66.294,50.419 66.294,64.135 61.849,64.135 61.849,50.419
  text "Valentirov Solutions" at 63.611,51.055 h1.52 r90
  text "RFM dev board v.1.1" at 65.389,51.054 h1.52 r90
Board Shape:
  the board outline again, w0.254

## Text inside footprints (layer, text, board x,y; h text height)
P2: Top Overlay "2" at 27.559,26.303 h1.27 r90; Top Overlay "1" at 30.099,26.543 h1.27 r90
P3: Top Overlay "1" at 65.532,26.275 h1.27 r90; Top Overlay "2" at 62.992,26.035 h1.27 r90